# Altium PCB PCB_FPC.PcbDoc
Units mm, origin at the board's own origin, x right, y up, seen from the top; angles counter-clockwise.
Board outline 37 x 15.6 mm, 2 copper layers (Top Layer, Bottom Layer); 3 components, 18 nets, 46 pads, 31 vias.
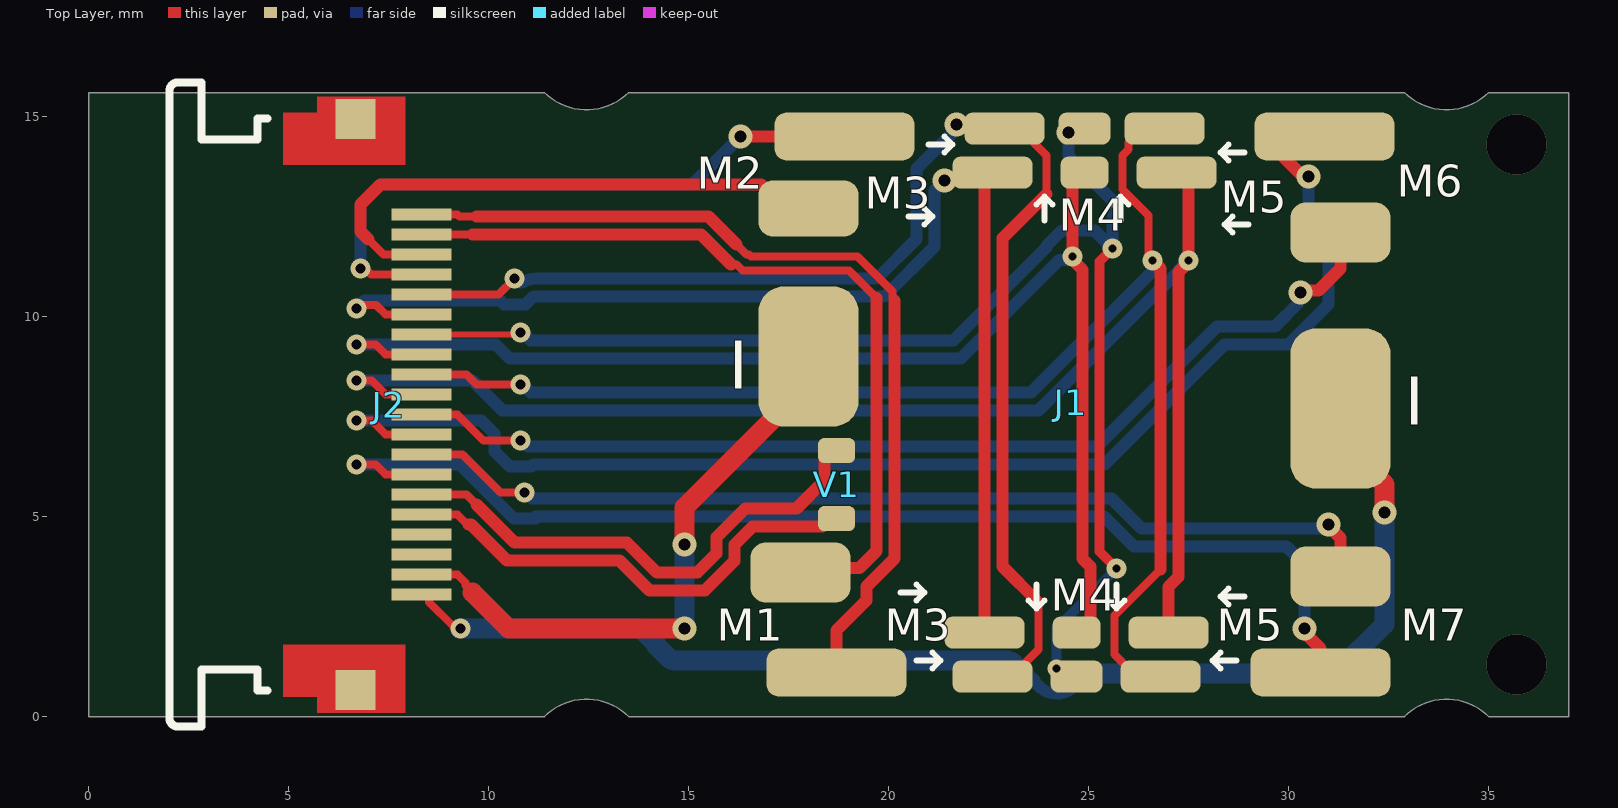
[diagram p0: Top Layer view]
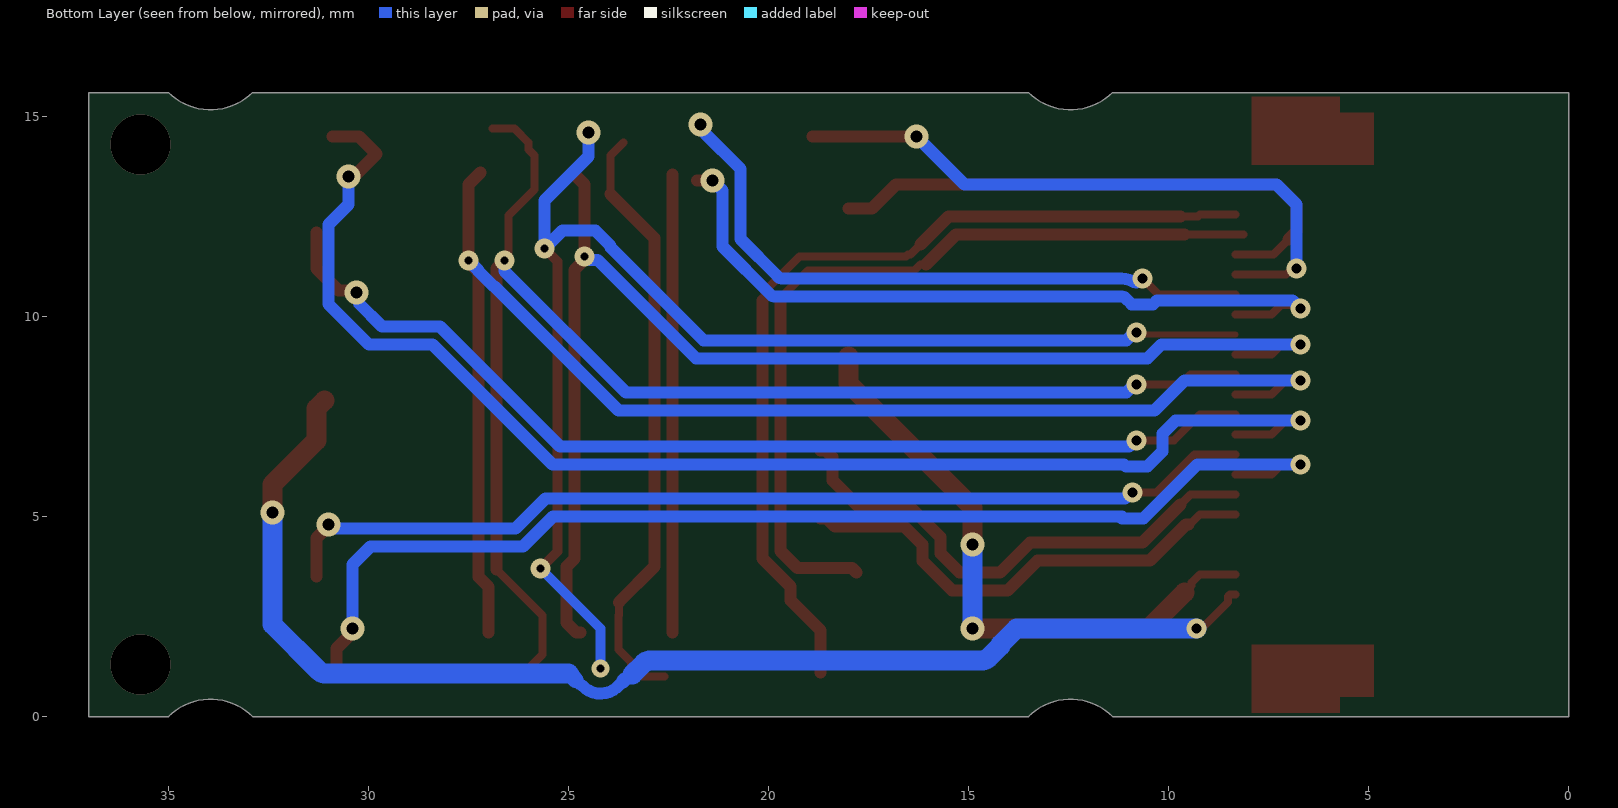
[diagram p1: Bottom Layer view, seen from below]

## Layer stack, top to bottom
Top Solder: solder mask 0.01, Solder Resist, Dk 3.5
Top Layer: signal copper 0.036
Dielectric 1: dielectric 0.32, FR-4, Dk 4.8
Bottom Layer: signal copper 0.036
Bottom Solder: solder mask 0.01, Solder Resist, Dk 3.5

## Board outline
0,0 0,15.6 11.4,15.6 ccw(c12.45,16.65) 13.5,15.6 32.9,15.6 ccw(c33.95,16.65) 35,15.6 37,15.6 37,0 35,0 ccw(c33.95,-1.05) 32.9,0 13.5,0 ccw(c12.45,-1.05) 11.4,0

## Design rules (kind name [scope] priority, off if disabled: settings)
Clearance [All] p1: gap=0.25 ignorepadtopadclearanceinfootprint=FALSE except(0: Arc-Hole Track-Hole SMDPad-Hole THPad-Hole Via-Hole Fill-Hole Poly-Hole Region-Hole Text-Hole; 0.15: Arc-Arc Arc-Track Track-Track; 0.2: SMDPad-SMDPad)
HoleSize [All] p1: absolutevalues=TRUE maxlimit=6.3 minlimit=0.2 maxpercent=80.000 minpercent=20.000
MinimumAnnularRing [All] p1: minimumring=0.13
MinimumSolderMaskSliver [All] p1 off: minsoldermaskwidth=0.254
PolygonConnect [All] p1: connectstyle=Relief reliefconductorwidth=0.254 reliefentries=4 polygonreliefangle="90 Angle" airgapwidth=0.254
RoutingVias [All] p1: holewidth=0.3 width=0.6 viastyle="Through Hole" minholewidth=0.2 minwidth=0.35 maxholewidth=6.3 maxwidth=6.7
SilkToSilkClearance [All] p1: silktosilkclearance=0.15
SilkToSolderMaskClearance [IsPad] p1: minsilkscreentomaskgap=0.15 clearancetoexposedcopper=TRUE
SolderMaskExpansion [All] p1: expansion=0.102 istentingtop=FALSE useseparateexpansions=TRUE expansionbottom=0.102 istentingbottom=TRUE
Width [All] p1: maxlimit=0.5 minlimit=0.15 preferedwidth=0.3 minimp=50.000000 maximp=50.000000 favimp=50.000000
26 further rules are at their usual default settings.

## Classes and differential pairs
net class [1..16]: 1 2 3 4 5 6 7 8 9 10 11 12 13 14 15 16

## Components (designator, comment, footprint, x,y, rotation, side; value= is the part's Value field where it differs from the comment)
J1 "sample_contact_place" sample 24.6,7.8 r0 top
J2 "52745-2097" MOLX-52745-2097 7.5,7.8 r270 top
V1 "Varicap" DIOC160X80X70L20N 18.7,5.8 r90 top

## Footprints (in the part's own frame and the unit in brackets; to place one, negate y for a bottom-side part, rotate by r counter-clockwise, add the part's x,y. Pads: shape width x height; smd on the part's side, far side on the other; paste and mask are expansions set on the pad)
DIOC160X80X70L20N [mm] "Diode, Chip; 1.60 mm L X 0.80 mm W X 0.70 mm H body"
  rrect51% 0.63x0.93 smd: A(0.85,0) C(-0.85,0)
  body extent -0.8,-0.4 0.8,0.4, height 0.7
MOLX-52745-2097 [mm] "FPC Connector, 20-Leads, Right Angle, Pitch 0.5 mm, Mated Height 2.0 mm, SMT"
  rect 0.3x1.5 smd: 1(-4.75,0.824) 2(-4.25,0.824) 3(-3.75,0.824) 4(-3.25,0.824) 5(-2.75,0.824) 6(-2.25,0.824) 7(-1.75,0.824) 8(-1.25,0.824) 9(-0.75,0.824) 10(-0.25,0.824) 11(0.25,0.824) 12(0.75,0.824) 13(1.25,0.824) 14(1.75,0.824) 15(2.25,0.824) 16(2.75,0.824) 17(3.25,0.824) 18(3.75,0.824) 19(4.25,0.824) 20(4.75,0.824)
  rect 1x1 smd: MP1(-7.134,-0.824) MP2(7.134,-0.824)
  Top Layer region: -7.7,0.424 -6,0.424 -6,-2.626 -7.3,-2.626 -7.3,-1.777 -7.7,-1.777
  Top Layer region: 6,0.424 7.7,0.424 7.7,-1.777 7.3,-1.777 7.3,-2.626 6,-2.626
  silkscreen extent -8.05,-5.48 8.05,-3.03, body extent -8.05,-5.48 8.05,0.92, height 2.01
sample [mm]
  rrect50% 3.5x1.2 smd: 1(-5.9,-6.7) 4(-5.7,6.7) 12(6.3,6.7) 14(6.2,-6.7)
  rrect50% 2.5x1.5 smd: 2(-6.8,-4.2) 11(6.7,4.3) 13(6.7,-4.3)
  rrect50% 2.5x1.4 smd: 3(-6.6,4.9)
  rrect50% 2x0.8 smd: 5(-2,-6.8) 5(-1.7,6.9) 6(-2.2,-5.7) 6(-2,5.8) 9(2.2,-6.8) 9(2.3,6.9) 10(2.4,-5.7) 10(2.6,5.8)
  rrect50% 1.3x0.8 smd: 7(0.1,-6.8) 7(0.3,6.9)
  rrect50% 1.2x0.8 smd: 8(0.1,-5.7) 8(0.3,5.8)
  rrect50% 2.5x3.5 smd: 15(-6.6,1.2)
  rrect50% 2.5x4 smd: 16(6.7,-0.1)
  silkscreen extent -4.3,-6.6 4.4,6.7, body extent -5,-5 5,5, height 1

## Part data
J2: "0.5 mm Pitch Easy-On(TM) Type FPC Connector, 2.0 mm Mated Height, Right Angle, ZIF, SMT, Top Contact, 20 Circuits, -20 to 85 degC, ELV and RoHS Compliant, Tape and Reel", Current (Max per Contact)=0.5A, Manufacturer=Molex, Voltage (Max)=50V, Circuits (Loaded)=20, ComponentLink1Description="Manufacturer URL", ComponentLink1URL=http://www.molex.com/molex/index.jsp, ComponentLink2Description=Datasheet, ComponentLink2URL=http://www.molex.com/webdocs/datasheets/pdf/en-us/0527452097_FFC_FPC_CONNECTORS.pdf, ComponentLink3Description="Package Specification", ComponentLink3URL=http://www.molex.com/pdm_docs/sd/527452097_sd.pdf, Contact Position=Top, Durability (mating cycles max)=20, Entry Angle="90degrees Angle", Mated Height=2.00mm, Material - Metal="Phosphor Bronze", Material - Plating Mating=Gold, Material - Plating Termination=Gold, Mounting Technology="Surface Mount", Number of Rows=1, Orientation="Right Angle", PackageDescription="20-Lead FPC Connector, Pitch 0.5 mm", PackageReference=52745-2097, PackageVersion="Rev. C, 07/2010", Packing="Tape and Reel", PartNumber=52745-2097, PCB Locator=No, PCB Retention=Yes, Pitch - Mating Interface=0.50mm, Polarized to PCB=Yes, RoHS=TRUE, Stackable=No

## Via types
v1: diameter 0.5, hole 0.25, Top Layer to Bottom Layer, tented bottom, 12 vias
v2: diameter 0.6, hole 0.3, Top Layer to Bottom Layer, tented bottom, 11 vias
v3: diameter 0.5, hole 0.2, Top Layer to Bottom Layer, tented bottom, 5 vias
v4: diameter 1.5, hole 1.5, Top Layer to Bottom Layer, tented bottom, 2 vias
v5: diameter 0.45, hole 0.2, Top Layer to Bottom Layer, tented bottom, 1 vias

## Nets (pads, with @x,y where several pads share a name; then routed paths per layer and width w, separated by ;. In a path a pad name is that pad's centre, name@x,y a point inside that pad or via, vN(x,y) a via of type N, cw(c..) or ccw(c..) an arc to the next point about the centre after c; other vN are vias at no path point)
1: J1.1 J2.1 | length 22.8
  Top Layer w0.2: J2.1 9.218,12.55 9.268,12.5 9.7,12.5 9.75,12.55 ; 16.2,11.8 16.45,11.55 16.516,11.55 16.566,11.5 19.228,11.5 20.1,10.628 20.1,10.45 20.15,10.4
  Top Layer w0.3: 9.7,12.5 15.5,12.5 16.2,11.8 ; J1.1 18.7,2.154 19.45,2.904 19.45,3.25 20.15,3.95 20.15,10.4
2: J1.2 J2.2 | length 21.5
  Top Layer w0.2: J2.2@8.124,12.05 9.6,12.05 10.4,12.05 ; 16.064,11.3 16.205,11.3 16.355,11.15 19.013,11.15 19.7,10.463
  Top Layer w0.3: 9.6,12.05 10.4,12.05 15.314,12.05 16.064,11.3 ; J1.2 17.912,3.712 19.276,3.712 19.7,4.136 19.7,10.463
3: J1.3 J2.3 | length 14.1
  Top Layer w0.2: 7,11.924 7.374,11.55 J2.3
  Top Layer w0.3: 7,11.924 6.8,12.124 6.8,12.8 7.3,13.3 16.812,13.3 17.412,12.7 J1.3
4: J1.4 J2.4 | length 16
  Top Layer w0.2: v1(6.8,11.2) 6.908,11.2 7.058,11.05 J2.4
  Top Layer w0.3: v2(16.3,14.5) J1.4
  Bottom Layer w0.3: v1(6.8,11.2) 6.8,12.8 7.3,13.3 15.1,13.3 v2(16.3,14.5)
5: J1.5 J2.5 | length 31.5
  Top Layer w0.2: J2.5 10.25,10.55 v1(10.654,10.954) ; J1.5@22.6,1 23.146,1 23.438,1.292 23.438,1.36 23.75,1.672 23.75,2.528 23.744,2.534 23.744,2.856 ; J1.5@23.628,14.35 23.95,14.028 23.95,13.172 23.95,13.061
  Top Layer w0.3: v2@21.581,14.8 v2(21.7,14.8) ; 23.744,2.856 22.85,3.75 22.85,11.961 23.95,13.061
  Bottom Layer w0.3: v1(10.654,10.954) v1@10.709,10.898 ; v1@10.71,10.898 ccw(c10.815,11.004) 10.888,10.874 cw(c11.181,10.35) 11.181,10.95 19.651,10.95 ccw(c19.651,11.1) 19.758,10.994 20.7,11.936 20.7,13.69 21.587,14.577 21.587,14.606 21.7,14.719 v2(21.7,14.8)
6: J1.6 J2.6 | length 30.5
  Top Layer w0.2: v1(6.7,10.2) 6.792,10.292 7.187,10.292 7.429,10.05 J2.6
  Top Layer w0.3: v2(21.4,13.4) J1.6@21.79,13.4 ; J1.6@22.4,2.1 J1.6@22.4,13.548
  Bottom Layer w0.3: v1(6.7,10.2) 6.9,10.4 10.288,10.4 10.384,10.304 10.923,10.304 11.075,10.456 cw(c11.181,10.35) 11.181,10.5 19.838,10.5 ccw(c19.838,10.65) 19.944,10.544 21.15,11.75 21.15,13.15 v2(21.4,13.4)
7: J1.7 J2.7 | length 33.5
  Top Layer w0.15: J2.7 10.75,9.55 v1(10.8,9.6)
  Top Layer w0.25: v3(25.6,11.7) 25.275,11.375 25.275,4.124 v3(25.7,3.699)
  Bottom Layer w0.25: v5(24.2,1.2) 24.2,2.198 v3(25.7,3.699)
  Bottom Layer w0.3: v1(10.8,9.6) 10.854,9.6 11.054,9.4 21.622,9.4 23.95,11.728 23.95,11.769 24.331,12.15 25.15,12.15 v3(25.6,11.7) 25.6,12.9 24.5,14 v2(24.5,14.6)
8: J1.8 J2.8 | length 32.8
  Top Layer w0.2: v1(6.7,9.3) 7.179,9.3 7.429,9.05 J2.8
  Top Layer w0.3: J1.8@24.7,2.1 24.804,2.1 25.05,2.346 25.05,3.747 24.85,3.947 24.85,11.169 24.692,11.327 24.692,11.354 24.6,11.446 24.6,13.3 J1.8@24.9,13.6
  Bottom Layer w0.3: v1(6.7,9.3) 10.181,9.3 10.531,8.95 21.809,8.95 24.276,11.417 24.463,11.417 24.546,11.5 v3(24.6,11.5)
9: J1.9 J2.9 | length 36.1
  Top Layer w0.2: J2.9 9.45,8.55 9.7,8.3 v1(10.8,8.3) ; v3(26.6,11.4) 26.5,11.5 26.5,12.522 25.85,13.172 25.85,14.028 26,14.178 26,14.346 26.354,14.7 J1.9@26.9,14.7 ; J1.9@26.8,1 26.2,1 25.65,1.55 25.65,2.528 26.8,3.678
  Top Layer w0.3: v3(26.6,11.4) 26.8,11.2 26.8,3.678
  Bottom Layer w0.3: v1(10.8,8.3) 10.854,8.3 11.054,8.1 23.564,8.1 26.599,11.135 v3(26.6,11.4) v3(26.6,11.4)
10: J1.10 J2.10 | length 36.3
  Top Layer w0.2: v1(6.7,8.4) 7.079,8.4 7.429,8.05 J2.10
  Top Layer w0.3: J1.10@27,2.1 27,3.241 27.25,3.491 27.25,11.112 27.5,11.362 v3(27.5,11.4) 27.5,13.3 J1.10@27.2,13.6
  Bottom Layer w0.3: v1(6.7,8.4) 9.6,8.4 10.35,7.65 23.75,7.65 26.85,10.75 26.869,10.75 27.25,11.131 27.25,11.15 v3(27.5,11.4)
11: J1.11 J2.11 | length 26.2
  Top Layer w0.2: J2.11 9.218,7.55 9.868,6.9 v1(10.8,6.9)
  Top Layer w0.3: v2(30.3,10.6) 30.35,10.65 30.75,10.65 31.3,11.2 J1.11
  Bottom Layer w0.3: v1(10.8,6.9) 10.838,6.9 10.988,6.75 25.214,6.75 28.214,9.75 29.662,9.75 30.243,10.33 30.243,10.543 v2(30.3,10.6)
12: J1.12 J2.12 | length 34.1
  Top Layer w0.2: v1(6.7,7.4) 7.079,7.4 7.429,7.05 J2.12
  Top Layer w0.3: v2(30.5,13.5) 30.361,13.5 29.8,14.061 30.239,14.5 J1.12
  Bottom Layer w0.3: v1(6.7,7.4) 9.822,7.4 10.15,7.072 10.15,6.631 10.531,6.25 11.069,6.25 11.119,6.3 25.4,6.3 28.4,9.3 29.99,9.3 31,10.31 31,12.3 30.5,12.8 v2(30.5,13.5)
13: J1.13 J2.13 | length 24.9
  Top Layer w0.2: J2.13 9.35,6.55 10.3,5.6 v1(10.9,5.6)
  Top Layer w0.3: v2(31,4.8) 31,4.764 31.3,4.464 J1.13
  Bottom Layer w0.3: v1(10.9,5.6) 10.938,5.6 11.088,5.45 25.575,5.45 26.325,4.7 30.819,4.7 30.919,4.8 v2(31,4.8)
14: J1.14 J2.14 | length 29.6
  Top Layer w0.2: v1(6.7,6.3) 7.179,6.3 7.429,6.05 J2.14
  Top Layer w0.3: v2(30.4,2.2) 30.3,2.2 30.8,1.7 J1.14
  Bottom Layer w0.3: v1(6.7,6.3) 9.281,6.3 10.631,4.95 11.169,4.95 11.219,5 ; 11.169,5 25.388,5 26.138,4.25 29.95,4.25 30.4,3.8 v2(30.4,2.2)
15: J1.15 J2.19 | length 15.3
  Top Layer w0.2: J2.19 9.218,3.55 9.424,3.345 9.424,3.276 9.6,3.1
  Top Layer w0.5: 9.6,3.1 10.5,2.2 v2(14.9,2.2) ; v2(14.9,4.3) 14.9,5.228 18,8.328 J1.15
  Bottom Layer w0.5: v2(14.9,2.2) v2(14.9,4.3)
16: J1.16 J2.20 | length 32
  Top Layer w0.2: J2.20 8.465,3.05 8.515,3 8.515,2.859 9.116,2.257 9.243,2.257 v1(9.3,2.2)
  Top Layer w0.5: J1.16@31.1,7.9 J1.16 31.3,6.904 32.4,5.804 v2(32.4,5.1)
  Bottom Layer w0.3: 23.635,0.878 23.655,0.894 ccw(c24.2,1.2) 24.658,0.774 ccw(c24.347,1.325) 24.828,0.914
  Bottom Layer w0.35: 23.404,1.049 ccw(c23.81,1.506) 23.556,0.95 cw(c23.483,0.791) 23.635,0.878
  Bottom Layer w0.4: 24.828,0.914 ccw(c24.402,1.326) 24.926,1.049 ccw(c24.542,1.57) 24.999,1.112
  Bottom Layer w0.5: v1(9.3,2.2) 13.8,2.2 14.2,1.8 14.2,1.769 14.495,1.473 ccw(c14.672,1.65) 14.672,1.4 22.95,1.4 cw(c22.95,1.15) 23.127,1.327 23.404,1.049 ; 24.999,1.074 31.07,1.074 ccw(c31.07,1.324) 31.247,1.147 32.4,2.3 v2(32.4,5.1)
NetJ2_15: J2.15 V1.A | length 13
  Top Layer w0.2: J2.15 9.45,5.55 9.7,5.3
  Top Layer w0.3: 9.7,5.3 10.65,4.35 13.46,4.35 14.21,3.6 15.222,3.6 15.7,4.078 15.7,4.482 16.419,5.201 17.7,5.201 18.401,5.903 18.401,6.486 18.565,6.65 V1.A
NetJ2_16: J2.16 V1.C | length 12.1
  Top Layer w0.2: J2.16 9.218,5.05 9.468,4.8 9.5,4.8
  Top Layer w0.3: 9.5,4.8 9.564,4.8 10.464,3.9 13.274,3.9 14.024,3.15 15.409,3.15 16.15,3.891 16.15,4.296 16.604,4.75 18.344,4.75 18.544,4.95 V1.C
pads on no net: J2.17 J2.18 J2.MP1 J2.MP2
copper on no net:
  other v4: 35.7,1.3 35.7,14.3

## Silkscreen, mask and mechanical layers (free items; w line width, h text height)
Mechanical 1:
  lines w0.1: 11.4,0 0.5,0 0,0 0,15.6 11.4,15.6 ; 13.5,0 32.9,0 ; 13.5,15.6 32.9,15.6 ; 35,0 37,0 37,15.6 35,15.6
Mechanical 2:
  lines w0.1: 11.4,0 cw(c12.45,-1.05) 13.5,0 11.4,0 ; 11.4,15.6 ccw(c12.45,16.65) 13.5,15.6 11.4,15.6 ; 32.9,0 cw(c33.95,-1.05) 35,0 32.9,0 ; 32.9,15.6 ccw(c33.95,16.65) 35,15.6 32.9,15.6

## Text inside footprints (layer, text, board x,y; h text height)
J1: Top Overlay "M5" at 28.2,1.9 h0.8; Top Overlay "M7" at 32.8,1.9 h0.8; Top Overlay "M6" at 32.7,13 h0.8; Top Overlay "M4" at 24.25,12.15 h0.8; Top Overlay "M3" at 19.4,12.7 h0.8; Top Overlay "M1" at 15.7,1.9 h0.8; Top Overlay "M2" at 15.2,13.2 h0.8; Top Overlay "M3" at 19.9,1.9 h0.8; Top Overlay "M4" at 24.05,2.65 h0.8; Top Overlay "M5" at 28.3,12.6 h0.8; Top Overlay "I" at 16,8.2 h1.2; Top Overlay "I" at 32.9,7.3 h1.2